# Altium PCB Cursach.PcbDoc
Units mil, origin at the board's own origin, x right, y up, seen from the top; angles counter-clockwise.
Board outline 1200 x 500 mil, 2 copper layers (Top Layer, Bottom Layer), stack 65.8 mil thick; 13 components, 9 nets, 36 pads, 0 vias.
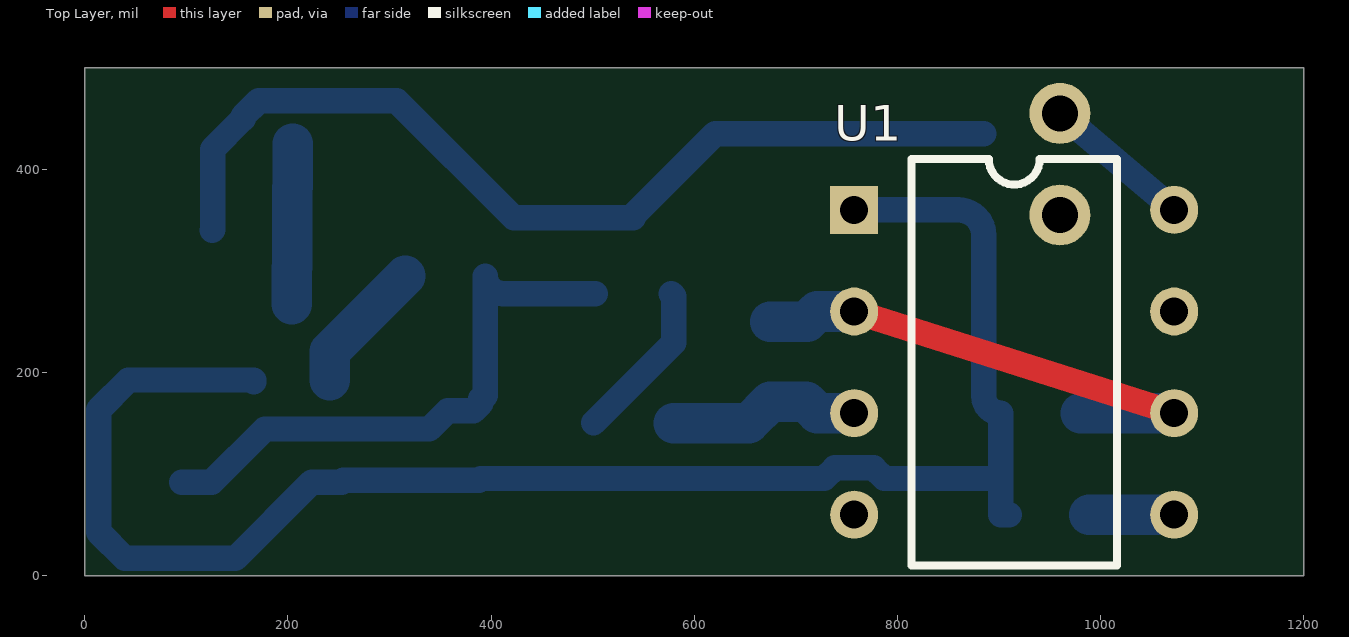
[diagram p0: Top Layer view]
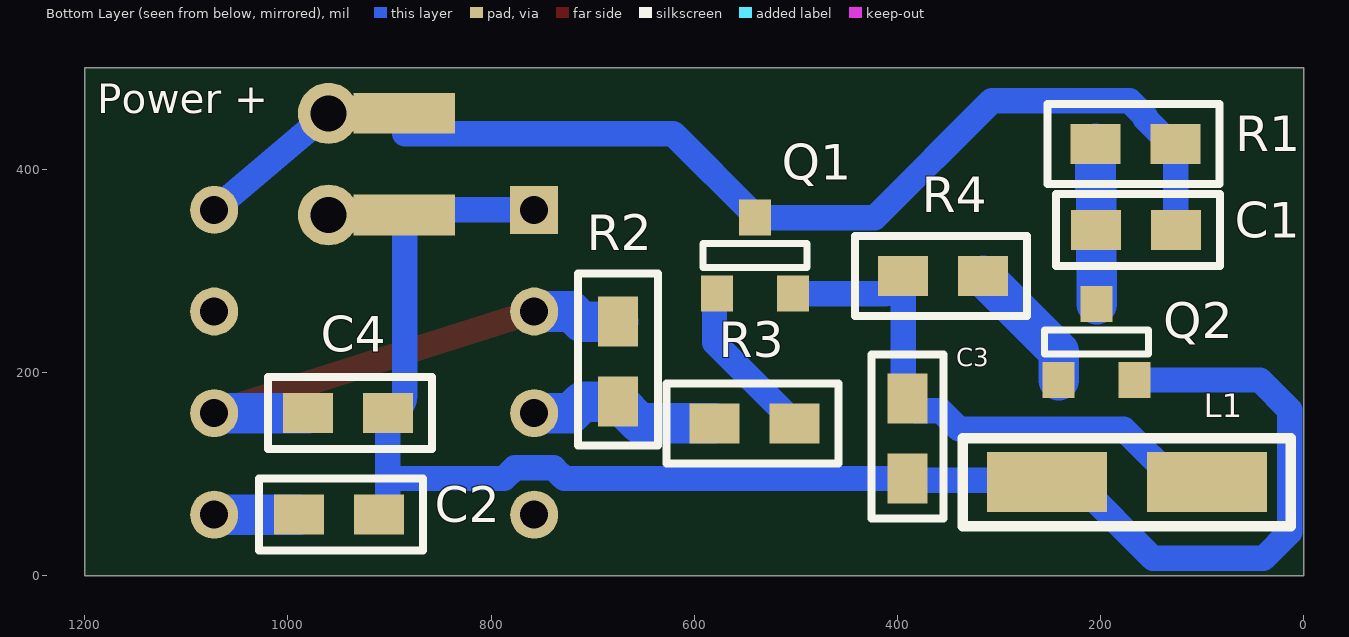
[diagram p1: Bottom Layer view, seen from below]
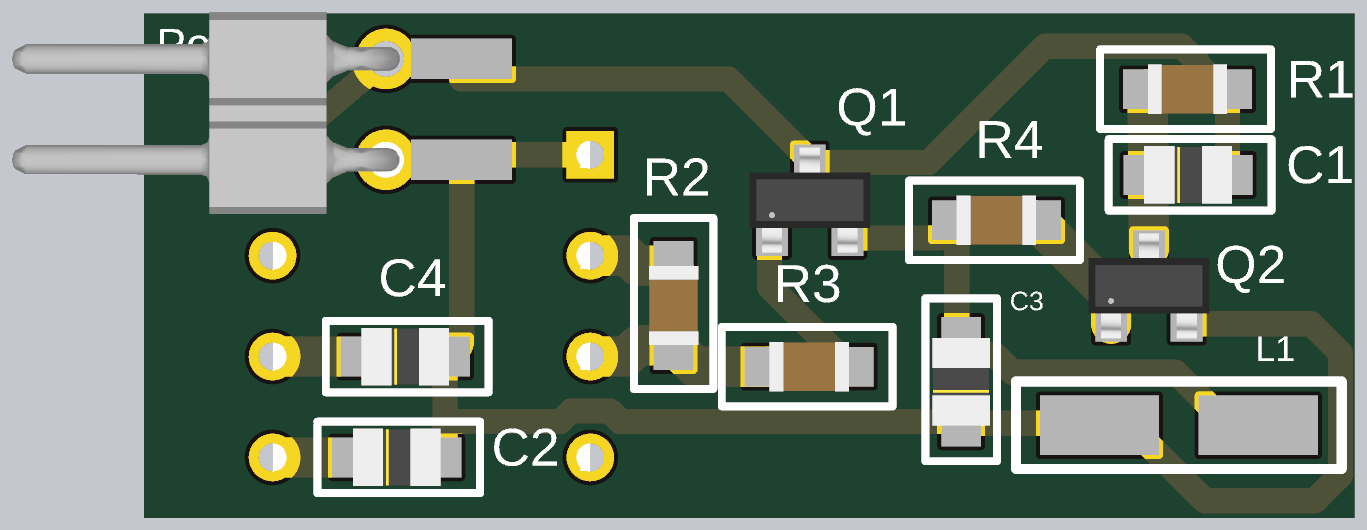
[diagram p2: 3D render of the assembled board from below, using the file's embedded part models]

## Layer stack, top to bottom
Top Solder: solder mask 0.4, Solder Resist, Dk 3.5
Top Layer: signal copper 1.4
Dielectric 1: dielectric 63, FR-4, Dk 4.8
Bottom Layer: signal copper 1.4
Bottom Solder: solder mask 0.4, Solder Resist, Dk 3.5

## Board outline
0,0 1200,0 1200,500 0,500

## Design rules (kind name [scope] priority, off if disabled: settings)
Clearance [All] p1: gap=10 ignorepadtopadclearanceinfootprint=FALSE
PolygonConnect [All] p1: connectstyle=Relief reliefconductorwidth=10 reliefentries=4 polygonreliefangle="90 Angle" airgapwidth=10
RoutingVias [All] p1: holewidth=28 width=50 viastyle="Through Hole" minholewidth=28 minwidth=50 maxholewidth=28 maxwidth=50
SilkToSilkClearance [All] p1: silktosilkclearance=7
SilkToSolderMaskClearance [IsPad] p1: minsilkscreentomaskgap=4 clearancetoexposedcopper=TRUE
SolderMaskExpansion [All] p1: expansion=4 istentingtop=FALSE
Width [All] p1: maxlimit=50 minlimit=15 preferedwidth=25
28 further rules are at their usual default settings.

## Components (designator, comment, footprint, x,y, rotation, side; value= is the part's Value field where it differs from the comment)
C1 "10uF" C0805 165,340 r180 bottom
C2 "10nF" C0805 949.37,60 r180 bottom
C3 "10nF" C0805 390,135 r90 bottom
C4 "100nF" C0805 941,160 r180 bottom
L1 "Lx" LX 174.2,92 r270 bottom
"Power +" "POWER PLACE" POWEPLC 960,405 r180 bottom (schematic designator J1)
Q1 "2N2222" 2N2222SMD 540,315 r180 bottom
Q2 "2N2222" 2N2222SMD 203.9,230 r180 bottom
R1 "1kR" R0805 165.63,425 r180 bottom
R2 "1kR" R0805 675,210.63 r270 bottom
R3 "4.7kR" R0805 540.63,150 r180 bottom
R4 "160kR" R0805 355,295 r180 bottom
U1 "NE555P" NE555 915,210 r0 top

## Footprints (in the part's own frame and the unit in brackets; to place one, negate y for a bottom-side part, rotate by r counter-clockwise, add the part's x,y. Pads: shape width x height; smd on the part's side, far side on the other; paste and mask are expansions set on the pad)
2N2222SMD [mm]
  rect 0.8x0.9 smd: 1(-0.95,-0.95) 2(0.95,-0.95) 3(0,0.95)
  silkscreen extent -1.3,-0.3 1.3,0.3, body extent -1.52,-1.32 1.52,1.32, height 1.12
C0805 [mm]
  rect 1.25x1 smd: 1(-1,0) 2(1,0)
  silkscreen extent -2,-0.9 2.1,0.9, body extent -1.1,-0.72 1.11,0.72, height 0.94
LX [mm]
  rect 1.5x3 smd: 1(0,2) 2(0,-2)
  silkscreen extent -1.1,-4.1 1.1,4.1
NE555 [mm]
  rect 1.2x1.2 hole 0.7: 1(-4,3.81)
  round 1.2 hole 0.7: 2(-4,1.27) 3(-4,-1.27) 4(-4,-3.81) 5(4,-3.81) 6(4,-1.27) 7(4,1.27) 8(4,3.81)
  silkscreen extent -2.57,-5.08 2.57,5.08, body extent -4,-4.85 4,4.65, height 4.5
POWEPLC [mil]
  round 60 hole 35.43: 1(0,50) 2(0,-50)
  rect 100x40 smd: 1(74.8,50) 2(74.8,-50)
  body extent -370,-104 14,96, height 100
R0805 [mm]
  rect 1.25x1 smd: 1(-1,0) 2(1,0)
  silkscreen extent -2.2,-1 2.1,1, body extent -1,-0.63 1,0.62, height 0.65

## Part data
C1: library part Cap_0805_10u, "Cap Ceramic 10uF 16V X5R 10% SMD 0805 85C Cardboard T/R", Case Code (Imperial)=0805, Case Code (Metric)=2012, Dielectric=X5R, Manufacturer=Samsung, Manufacturer Part Number=CL21A106KOCLRNC, Max Operating Temperature=85°C, Min Operating Temperature=-55°C, Package Quantity=1, Supplier Part Number 1=8103687, Tolerance=10%, Voltage Rating=16V, Capacitance=10uF, Case/Package=0805, Category="Ceramic Capacitors", ComponentLink1Description=https://datasheet.ciiva.com/25797/cl21a106koclrnc-25797024.pdf?src-supplier=Digi-Key, ComponentLink1URL=https://datasheet.ciiva.com/25797/cl21a106koclrnc-25797024.pdf?src-supplier=Digi-Key, ComponentLink2Description=https://datasheet.ciiva.com/26838/getdatasheetpartid-357378-26838585.pdf?src-supplier=Verical, ComponentLink2URL=https://datasheet.ciiva.com/26838/getdatasheetpartid-357378-26838585.pdf?src-supplier=Verical, Construction=Flat, Depth=1.25mm, Height=0.85mm, Lead Free="Lead Free", Length=2mm, Mount="Surface Mount", Packaging="Tape and Reel", Pricing 1="1=0,17600, 50=0,07680, 100=0,06630, 500=0,04710, 1500=0,03730 (USD)", Radiation Hardening=No, RoHS=Yes, RoHS Compliant=Yes, Series=CL, Stock 1=131352, Supplier 1="Future Electronics", Thickness=0.037inch, Width=0.049inch
C2 C3: library part Cap_0805_10n, "Cap Ceramic 0.01uF 25V X7R 10% Pad SMD 0805 125°C T/R", Case Code (Imperial)=0805, Case Code (Metric)=2012, Dielectric=X7R, Manufacturer=Samsung, Manufacturer Part Number=CL21B103KAANNNC, Max Operating Temperature=125°C, Min Operating Temperature=-55°C, Package Quantity=1, Supplier Part Number 1=1276-2434-1-ND, Tolerance=10%, Voltage Rating=25V, Capacitance=10nF, Case/Package=0805, Category="Ceramic Capacitors", ComponentLink1Description=https://datasheet.ciiva.com/25781/cl21b103kaannnc-25781200.pdf?src-supplier=Digi-Key, ComponentLink1URL=https://datasheet.ciiva.com/25781/cl21b103kaannnc-25781200.pdf?src-supplier=Digi-Key, ComponentLink2Description=https://datasheet.ciiva.com/16199/cl05b104kq5nnnc-16199720.pdf?src-supplier=Future+Electronics, ComponentLink2URL=https://datasheet.ciiva.com/16199/cl05b104kq5nnnc-16199720.pdf?src-supplier=Future+Electronics, Construction=Flat, Depth=1.25mm, Height=0.65mm, Length=2mm, Mount="Surface Mount", Packaging="Tape and Reel", Pricing 1="1=0,10000, 10=0,04700, 50=0,02560, 100=0,02080, 500=0,01490, 1000=0,01170 (USD)", Radiation Hardening=No, RoHS=Yes, RoHS Compliant=Yes, Series=CL, Stock 1=1191, Supplier 1=Digi-Key, Thickness=0.03inch, Width=0.049inch
C4: library part Cap_0805_100n, "WALSIN - 0805B104K160CT - Keramikvielschichtkondensator, SMD, 0.1 µF, 16 V, 0805 [Metrisch 2012], ± 10%, X7R", Case Code (Imperial)=0805, Case Code (Metric)=2012, Case/Package=Ceramic, Dielectric=X7R, Manufacturer="Walsin Technologies", Manufacturer Part Number=0805B104K160CT, Max Operating Temperature=125°C, Min Operating Temperature=-55°C, Supplier Part Number 1=1292-1565-1-ND, Tolerance=10%, Voltage Rating=16V, Capacitance=100nF, Category="Ceramic Capacitors", ComponentLink1Description=https://datasheet.ciiva.com/26864/getdatasheetpartid-556603-26864634.pdf?src-supplier=Verical, ComponentLink1URL=https://datasheet.ciiva.com/26864/getdatasheetpartid-556603-26864634.pdf?src-supplier=Verical, Depth=1.25mm, Length=2mm, Packaging="Tape and Reel", Pricing 1="1=0,12000, 10=0,08600, 50=0,04900, 100=0,04050, 500=0,02842, 1000=0,02352 (USD)", Radiation Hardening=No, REACH SVHC=Unknown, RoHS=Yes, RoHS Compliant=Yes, Stock 1=12085, Supplier 1=Digi-Key, Voltage Rating (DC)=16V
Q1 Q2: library part SMMBT2222ALT1G, "ON SEMICONDUCTOR         SMMBT2222ALT1G             Bipolar (BJT) Single Transistor, NPN, 40 V, 300 MHz, 225 mW, 600 mA, 40 hFE                          New", Case/Package=SOT-23-3, Collector Base Voltage (VCBO)=75V, Collector Emitter Breakdown Voltage=40V, Collector Emitter Saturation Voltage=1V, Emitter Base Voltage (VEBO)=6V, Frequency=300MHz, Manufacturer="ON Semiconductor", Max Collector Current=600mA, Max Frequency=100MHz, Max Operating Temperature=150°C, Max Power Dissipation=225mW, Min Operating Temperature=-55°C, Package Quantity=3000, Power Dissipation=300mW, Supplier Part Number 1=7815222, Category=BJTs, Collector Emitter Voltage (VCEO)=40V, Collector-emitter Voltage-Max=1V, ComponentLink1Description=https://datasheet.ciiva.com/980/mmbt2222lt1-d-980645.pdf?src-supplier=Digi-Key, ComponentLink1URL=https://datasheet.ciiva.com/980/mmbt2222lt1-d-980645.pdf?src-supplier=Digi-Key, ComponentLink2Description=https://datasheet.ciiva.com/16285/mmbt2222lt1-d-80103-16285882.pdf?src-supplier=Mouser, ComponentLink2URL=https://datasheet.ciiva.com/16285/mmbt2222lt1-d-80103-16285882.pdf?src-supplier=Mouser, ComponentLink3Description=https://datasheet.ciiva.com/16488/mmbt2222lt1-d-16488314.pdf?src-supplier=Future+Electronics, ComponentLink3URL=https://datasheet.ciiva.com/16488/mmbt2222lt1-d-16488314.pdf?src-supplier=Future+Electronics, Contact Plating=Tin,Matte, Element Configuration=Single, Gain Bandwidth Product=300MHz, Height=1.11mm, hFE Min=100, Lead Free="Lead Free", Length=3.04mm, Manufacturer Part Number=SMMBT2222ALT1G, Max Breakdown Voltage=40V, Number of Elements=1, Number of Pins=3, Packaging="Tape and Reel", Polarity=NPN, Pricing 1="100=0,07100, 200=0,05900, 500=0,05200, 1000=0,04500, 2000=0,04400 (USD)", Radiation Hardening=No, REACH SVHC="No SVHC", RoHS=Yes, RoHS Compliant=Yes, Series=-, Stock 1=6700, Supplier 1=RSComponents, Transition Frequency=300MHz, Width=2.64mm
R1 R2: library part Res_0805_1k, "KOA SPEER ELECTRONICS         RK73H2ATTD1001F             SMD Chip Resistor, Thick Film, 1 kohm, 150 V, 0805 [2012 Metric], 125 mW,  1%, RK73H Series", Case Code (Imperial)=0805, Case Code (Metric)=2012, Manufacturer="KOA Speer", Manufacturer Part Number=RK73H2ATTD1001F, Max Operating Temperature=155°C, Min Operating Temperature=-55°C, Package Quantity=5000, Power Rating=125mW, Resistance Tolerance=1%, Resistor Type="Thick Film", Supplier Part Number 1=2019-RK73H2ATTD1001FCT-ND, Temperature Coefficient=100ppm/°C, Voltage Rating=150V, Case/Package=0805, Category="Chip SMD Resistors", ComponentLink1Description=https://datasheet.ciiva.com/5557/rk73h-5557241.pdf?src-supplier=Mouser, ComponentLink1URL=https://datasheet.ciiva.com/5557/rk73h-5557241.pdf?src-supplier=Mouser, ComponentLink2Description=https://datasheet.ciiva.com/7706/549017-7706107.pdf?src-supplier=Element14, ComponentLink2URL=https://datasheet.ciiva.com/7706/549017-7706107.pdf?src-supplier=Element14, Construction=Rectangular, Depth=1.25mm, Height=0.5mm, Lead Free="Lead Free", Length=2mm, Military Standard=Not, Number of Pins=2, Packaging="Tape and Reel", Pricing 1="1=0,10000, 10=0,03500, 100=0,01420, 1000=0,00640, 2500=0,00556 (USD)", REACH SVHC=Unknown, Resistance=1kR, RoHS=Yes, RoHS Compliant=Yes, Series=RK73H, Stock 1=32, Supplier 1=Digi-Key, Termination=SMD/SMT, Tolerance=1%, Voltage Rating (DC)=150V, Width=1.25mm
R3: library part Res_0805_4.7k, "Res Thick Film 0805 4.7K Ohm 1% 0.25W(1/4W) ±100ppm/C Pad SMD Automotive T/R", Case Code (Imperial)=0805, Case Code (Metric)=2012, Manufacturer="KOA Speer", Manufacturer Part Number=RK73H2ATTD4701F, Max Operating Temperature=155°C, Min Operating Temperature=-55°C, Package Quantity=5000, Power Rating=125mW, Resistance Tolerance=1%, Resistor Type="Thick Film", Supplier Part Number 1=85AH1468, Temperature Coefficient=100ppm/°C, Voltage Rating=150V, Case/Package=0805, Category="Chip SMD Resistors", ComponentLink1Description=https://datasheet.ciiva.com/7706/549017-7706124.pdf?src-supplier=Element14, ComponentLink1URL=https://datasheet.ciiva.com/7706/549017-7706124.pdf?src-supplier=Element14, Height=0.5mm, Lead Free="Lead Free", Length=2mm, Number of Pins=2, Packaging="Tape and Reel", Pricing 1="10=0,05500, 25=0,03500, 50=0,02500, 100=0,01900, 250=0,01400 (USD)", REACH SVHC=Unknown, Resistance=4.7kR, RoHS=Yes, RoHS Compliant=Yes, Series=RK73H, Stock 1=68360, Supplier 1=Newark, Termination=SMD/SMT, Tolerance=1%, Voltage Rating (DC)=150V, Width=1.25mm
R4: library part Res_0805_160k, "Thick Film Resistors - SMD 0805 160Kohms 1% Tol", Case Code (Imperial)=0805, Case Code (Metric)=2012, Manufacturer=Panasonic, Manufacturer Part Number=ERJ-6ENF1603V, Max Operating Temperature=155°C, Max Power Dissipation=125mW, Min Operating Temperature=-55°C, Package Quantity=1, Resistance Tolerance=1%, Resistor Type="Thick Film", Supplier Part Number 1=P160KCCT-ND, Temperature Coefficient=100ppm/°C, Voltage Rating=150V, Case/Package=0805, Category="Chip SMD Resistors", ComponentLink1Description=https://datasheet.ciiva.com/22674/1678782-22674517.pdf?src-supplier=Element14, ComponentLink1URL=https://datasheet.ciiva.com/22674/1678782-22674517.pdf?src-supplier=Element14, ComponentLink2Description=https://datasheet.ciiva.com/46436/1678782-46436470.pdf?src-supplier=Element14, ComponentLink2URL=https://datasheet.ciiva.com/46436/1678782-46436470.pdf?src-supplier=Element14, ComponentLink3Description=https://datasheet.ciiva.com/9185/aoa0000ce2-9185402.pdf?src-supplier=Avnet, ComponentLink3URL=https://datasheet.ciiva.com/9185/aoa0000ce2-9185402.pdf?src-supplier=Avnet, ComponentLink4Description=https://datasheet.ciiva.com/22739/1678782-22739739.pdf?src-supplier=Element14, ComponentLink4URL=https://datasheet.ciiva.com/22739/1678782-22739739.pdf?src-supplier=Element14, ComponentLink5Description=https://datasheet.ciiva.com/24060/aoa0000ce2-24060654.pdf?src-supplier=Mouser, ComponentLink5URL=https://datasheet.ciiva.com/24060/aoa0000ce2-24060654.pdf?src-supplier=Mouser, ComponentLink6Description=https://datasheet.ciiva.com/46436/1678782-46436469.pdf?src-supplier=Element14, ComponentLink6URL=https://datasheet.ciiva.com/46436/1678782-46436469.pdf?src-supplier=Element14, ComponentLink7Description=https://datasheet.ciiva.com/17207/aoa0000ce2-17207337.pdf?src-supplier=Avnet+Europe, ComponentLink7URL=https://datasheet.ciiva.com/17207/aoa0000ce2-17207337.pdf?src-supplier=Avnet+Europe, Construction=Rectangular, Contact Plating=Tin, Depth=1.25mm, Features="Automotive AEC-Q200", Height=0.028inch, Length=2mm, Military Standard=Not, Mount="Surface Mount", Number of Terminations=2, Packaging="Tape and Reel", Power Rating=125mW, Pricing 1="1=0,10000, 10=0,07500, 100=0,02880, 1000=0,01265, 2500=0,01092 (USD)", Radiation Hardening=No, REACH SVHC="No SVHC", Resistance=160kR, RoHS=Yes, RoHS Compliant=Yes, Series=ERJ, Stock 1=3366, Supplier 1=Digi-Key, Termination=SMD/SMT, Tolerance=1%, Width=0.049inch
U1: "Standard Timer Single 8-Pin PDIP Tube", Case/Package=PDIP, Current Rating=10mA, Frequency=500kHz, High Level Output Current=-200mA, Low Level Output Current=200mA, Manufacturer="Texas Instruments", Max Operating Temperature=70°C, Max Supply Voltage=16V, Min Operating Temperature=0°C, Min Supply Voltage=4.5V, Nominal Supply Current=2mA, Operating Supply Voltage=5V, Package Quantity=50, Quiescent Current=15mA, Supplier Part Number 1=296-NE555P-ND, Category="Clock and Timing", ComponentLink1Description=https://datasheet.ciiva.com/1139/sa555-1139904.pdf?src-supplier=Element14, ComponentLink1URL=https://datasheet.ciiva.com/1139/sa555-1139904.pdf?src-supplier=Element14, ComponentLink2Description=https://datasheet.ciiva.com/19457/904085-19457361.pdf?src-supplier=Jameco, ComponentLink2URL=https://datasheet.ciiva.com/19457/904085-19457361.pdf?src-supplier=Jameco, ComponentLink3Description=https://datasheet.ciiva.com/26325/152184-da-01-en-ne555p-timer-tid-26325915.pdf?src-supplier=Conrad, ComponentLink3URL=https://datasheet.ciiva.com/26325/152184-da-01-en-ne555p-timer-tid-26325915.pdf?src-supplier=Conrad, ComponentLink4Description=https://datasheet.ciiva.com/1147/1764032-1147750.pdf?src-supplier=Newark, ComponentLink4URL=https://datasheet.ciiva.com/1147/1764032-1147750.pdf?src-supplier=Newark, ComponentLink5Description=https://datasheet.ciiva.com/14094/ne555-series-eng-tds-14094950.pdf?src-supplier=Distrelec, ComponentLink5URL=https://datasheet.ciiva.com/14094/ne555-series-eng-tds-14094950.pdf?src-supplier=Distrelec, ComponentLink6Description=https://datasheet.ciiva.com/14274/ne555-14274456.pdf?src-supplier=Avnet, ComponentLink6URL=https://datasheet.ciiva.com/14274/ne555-14274456.pdf?src-supplier=Avnet, ComponentLink7Description=https://datasheet.ciiva.com/15152/getdatasheetpartid-248510-15152620.pdf?src-supplier=Verical, ComponentLink7URL=https://datasheet.ciiva.com/15152/getdatasheetpartid-248510-15152620.pdf?src-supplier=Verical, ComponentLink8Description=https://datasheet.ciiva.com/1233/ne555-1233454.pdf?src-supplier=Digi-Key, ComponentLink8URL=https://datasheet.ciiva.com/1233/ne555-1233454.pdf?src-supplier=Digi-Key, ComponentLink9Description=https://datasheet.ciiva.com/26228/ne555-26228892.pdf?src-supplier=Avnet+Europe, ComponentLink9URL=https://datasheet.ciiva.com/26228/ne555-26228892.pdf?src-supplier=Avnet+Europe, Contact Plating=Gold, Height=4.57mm, Lead Free="Lead Free", Length=9.81mm, Manufacturer Part Number=NE555P, Mount="Through Hole", Number of Pins=8, Number of Timers/Counters=1, Operating Supply Current=10mA, Packaging=Rail/Tube, Pricing 1="1=0,37000, 10=0,29900, 25=0,27360, 100=0,20350, 250=0,18444, 500=0,15264, 1000=0,11448, 2500=0,10494, 5000=0,10020 (USD)", Radiation Hardening=No, REACH SVHC="No SVHC", RoHS=Yes, RoHS Compliant=Yes, Stock 1=3671, Supplier 1=Digi-Key, Weight=0.015535oz, Width=6.35mm

## Nets (pads, with @x,y where several pads share a name; then routed paths per layer and width w, separated by ;. In a path a pad name is that pad's centre, name@x,y a point inside that pad or via, vN(x,y) a via of type N, cw(c..) or ccw(c..) an arc to the next point about the centre after c; other vN are vias at no path point)
GND: "Power +.2" C2.2 C3.1 C4.2 L1.2 Q2.2 U1.1 | length 1662.4
  Bottom Layer w25: Q2.2 166.5,190.63 164.53,192.6 43.15,192.6 13.91,163.36 13.91,42.74 39.64,17 148.42,17 223.42,92 L1.2 254.76,93.81 388.19,93.81 C3.1 727.92,95.63 738.42,106.12 776.62,106.12 787.12,95.63 901.63,95.63 ; U1.1 860,360 cw(c860,335) 885,335 885,176.63 ccw(c901.63,176.63) C4.2 901.63,95.63 ; C2.2 901.63,60 901.63,95.63
net_C4: C4.1 R2.1 U1.2 U1.6 | length 509.2
  Top Layer w25: U1.2 U1.6
  Bottom Layer w40: R2.1 711,250 721,260 U1.2 ; C4.1 U1.6
net_cv: C2.1 U1.5 | length 83.7
  Bottom Layer w40: C2.1 U1.5
net_lc: C3.2 L1.1 Q1.2 R4.1 | length 572.8
  Bottom Layer w25: L1.1 124.99,92 177.37,144.38 339.38,144.38 357.26,162.26 382.81,162.26 390,169.45 C3.2 ccw(c390,178.74) 394.37,178.74 R4.1 ccw(c411.77,295) 411.77,277.6 Q1.2
net_out: R2.2 R3.1 U1.3 | length 191
  Bottom Layer w40: R3.1 653.74,150 R2.2 710,171.26 721.26,160 U1.3
net_q1b: Q1.1 R3.2 | length 161.1
  Bottom Layer w25: R3.2@500.91,150.35 580,229.45 580,275 Q1.1
net_q2b: Q2.1 R4.2 | length 133.2
  Bottom Layer w40: Q2.1 241.31,220.68 R4.2
net_q2c: C1.1 Q2.3 R1.1 | length 158.1
  Bottom Layer w40: Q2.3 203.9,303 204.37,303.47 C1.1 204.37,382 205,382.63 R1.1
VCC: "Power +.1" C1.2 Q1.3 R1.2 U1.8 | length 1090.3
  Bottom Layer w25: C1.2 125.94,340.31 125.94,419.76 156.04,449.86 156.04,452.16 171.39,467.5 307.13,467.5 422.23,352.4 Q1.3 540,354.37 620.63,435 885,435 ; 960,455 U1.8
pads on no net: U1.4 U1.7

## Silkscreen, mask and mechanical layers (free items; w line width, h text height)
Board outline:
  the board outline again, w10